# Altium PCB PCB_board.PcbDoc
Units mm, origin at the board's own origin, x right, y up, seen from the top; angles counter-clockwise.
Board outline 43 x 43 mm, 2 copper layers (Top Layer, Bottom Layer), stack 0.325 mm thick; 52 components, 33 nets, 177 pads, 43 vias.
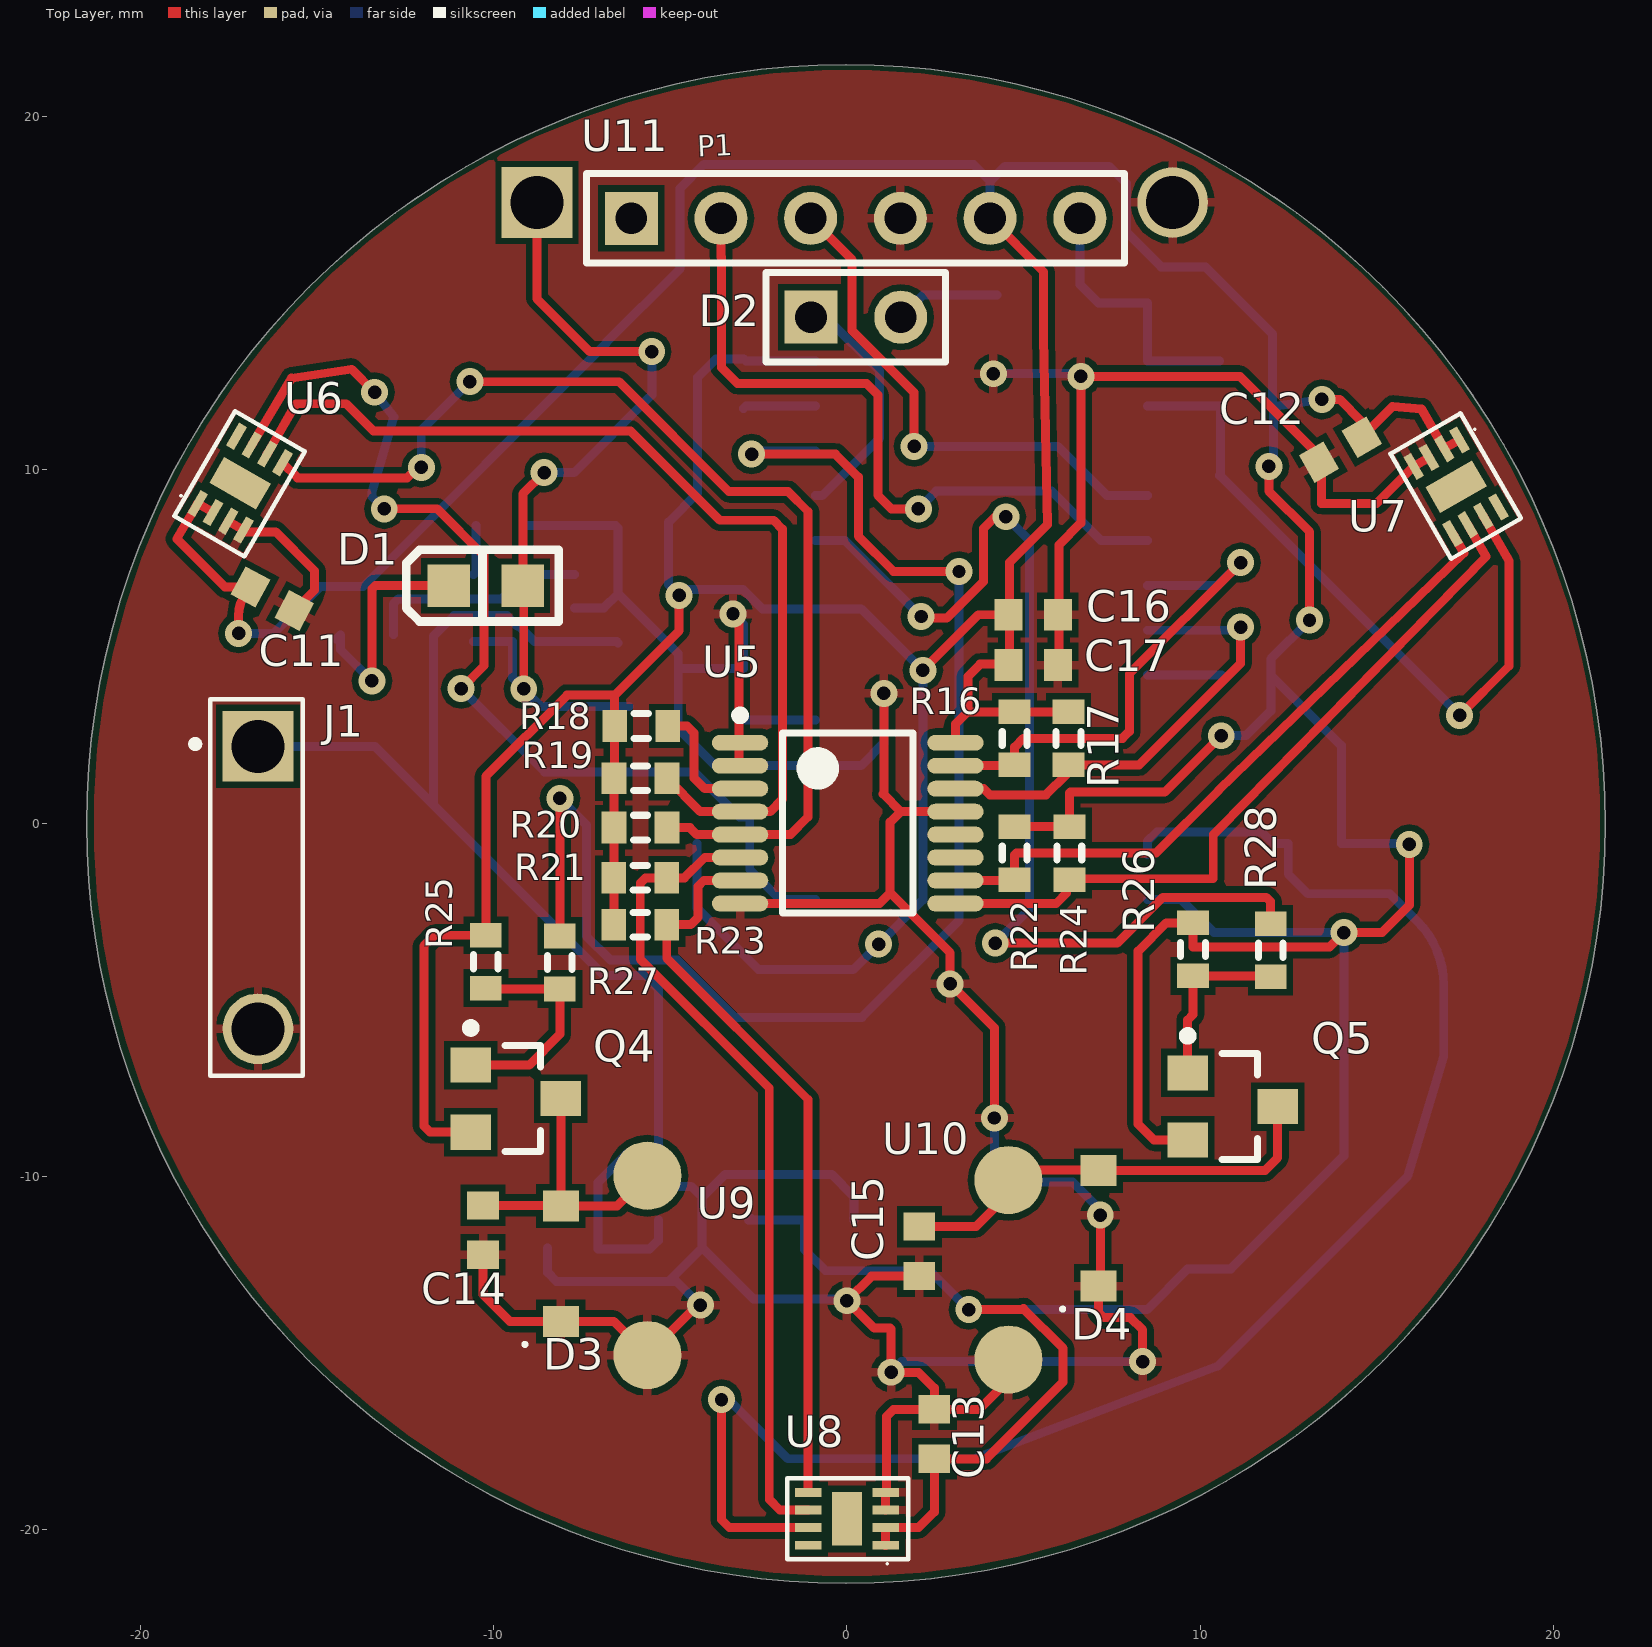
[diagram p0: Top Layer view]
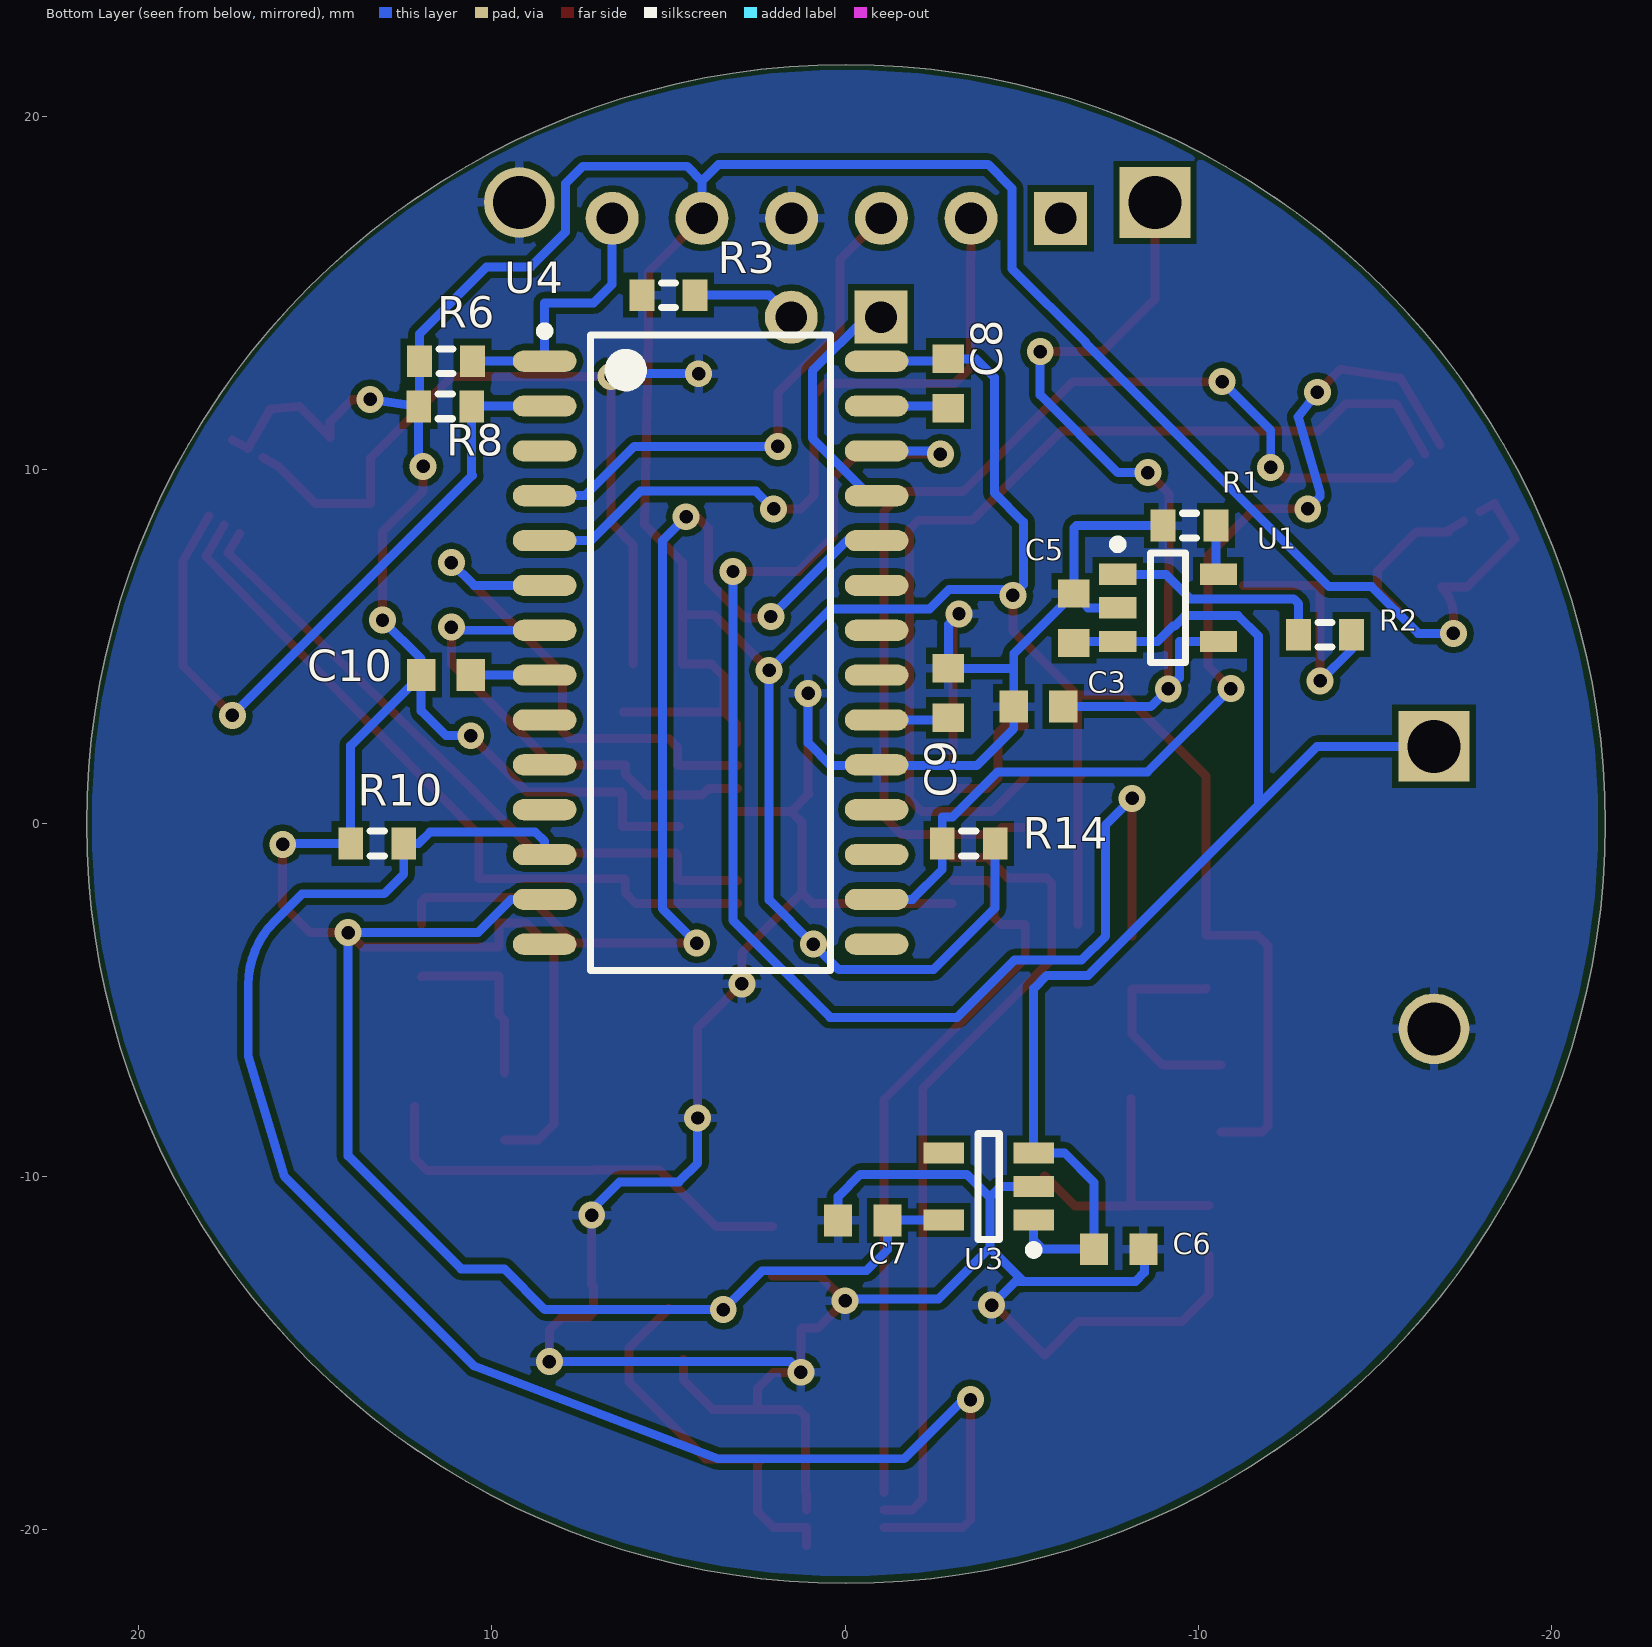
[diagram p1: Bottom Layer view, seen from below]

## Layer stack, top to bottom
Top Solder: solder mask 0.0102, Solder Resist, Dk 3.5
Top Layer: signal copper 0.0356
Dielectric 1: core 0.254, FR-4, Dk 4.2
Bottom Layer: signal copper 0.0356
Bottom Solder: solder mask 0.0102, Solder Resist, Dk 3.5

## Board outline
-21.525,-0.025 ccw(c-0.025,-0.025) -0.025,-21.525 ccw(c-0.025,-0.025) 21.475,-0.025 ccw(c-0.025,-0.025) -0.025,21.475 ccw(c-0.025,-0.025)

## Design rules (kind name [scope] priority, off if disabled: settings)
BoardOutlineClearance [All] p1: gap=0.178 ignorepadtopadclearanceinfootprint=FALSE
Clearance [All] p1: gap=0.18 ignorepadtopadclearanceinfootprint=TRUE
ComponentClearance [All] p1: gap=0 collisioncheckmode=3 verticalgap=0 showdistances=FALSE
ComponentOrientations [All] p1: allowedrotations=32
MinimumSolderMaskSliver MinimumSolderMaskSliver_1 [InComponent('U6') or InComponent('U7') or InComponent('U8') or InComponent('U3') or InComponent('U2') or InComponent('U1')] p1: minsoldermaskwidth=0
MinimumSolderMaskSliver [All] p2: minsoldermaskwidth=0.178
NetAntennae [All] p1 off: netantennaetolerance=0
PolygonConnect [All] p1: connectstyle=Relief reliefconductorwidth=0.254 reliefentries=4 polygonreliefangle="90 Angle" airgapwidth=0.18
RoutingVias [All] p1: holewidth=0.381 width=0.762 viastyle="Through Hole" minholewidth=0.381 minwidth=0.762 maxholewidth=0.711 maxwidth=1.27
SilkToSilkClearance [All] p1: silktosilkclearance=0.152
SilkToSolderMaskClearance [HasFootprint('J1-0603')] p1: minsilkscreentomaskgap=0.1 clearancetoexposedcopper=TRUE
SilkToSolderMaskClearance SilkToSolderMaskClearance_1 [IsPad] p2: minsilkscreentomaskgap=0.152 clearancetoexposedcopper=TRUE
SolderMaskExpansion [All] p1: expansion=0.102
UnpouredPolygon [All] p1: allowunpoured=TRUE
Width [All] p1: maxlimit=0.254 minlimit=0.25 preferedwidth=0.254
24 further rules are at their usual default settings.

## Components (designator, comment, footprint, x,y, rotation, side; value= is the part's Value field where it differs from the comment)
C3 "Cap Semi" 1608[0603] -5.475,3.3 r180 bottom value=4.7uF
C5 "Cap Semi" 1608[0603] -6.475,5.8 r270 bottom value=4.7uF
C6 "16V" 1608[0603] -7.747,-12.065 r0 bottom value=0.1uF
C7 "16V" 1608[0603] -0.5,-11.25 r180 bottom value=1.0uF
C8 "Cap Semi" 1608[0603] -2.921,12.446 r90 bottom value=20uF
C9 "Cap Semi" 1608[0603] -2.921,3.683 r270 bottom value="10uF 6.3V"
C10 "Cap Semi" 1608[0603] 11.303,4.191 r180 bottom value="10uF 6.3V"
C11 "Cap Semi" 1608[0603] -16.268,6.354 r332 top value="0.1uF 16V"
C12 "Cap Semi" 1608[0603] 13.975,10.575 r30 top value="0.1uF 16V"
C13 "Cap Semi" 1608[0603] 2.475,-17.3 r270 top value="0.1uF 16V"
C14 "Cap Semi" 1608[0603] -10.3,-11.525 r90 top value="47pF 50V"
C15 "Cap Semi" 1608[0603] 2.05,-12.125 r90 top value="47pF 50V"
C16 "Cap Semi" 1608[0603] 5.275,5.9 r180 top value="10uF 6.3V"
C17 "Cap Semi" 1608[0603] 5.275,4.475 r180 top value="0.1uF 16V"
D1 "LTST-C171KRKT" LED_pcb -9.175,6.725 r180 top
D2 "TLVP4201" HDR1X2 -1.015,14.325 r0 top
D3 "MBR0520L-D" SODFL375X128-2N -8.1,-12.475 r90 top
D4 "MBR0520L-D" SODFL375X128-2N 7.125,-11.475 r90 top
J1 "Battery connector" JST_S2B-PH-K-S(LF)(SN) -16.675,-1.825 r90 top
P1 "Header 6" HDR1X6 -6.105,17.125 r0 top
Q4 "NTR4101PT1G" SOT95P290X111-3N -9.375,-7.8 r0 top
Q5 "NTR4101PT1G" SOT95P290X111-3N 10.925,-8.025 r0 top
R1 "Res3" J1-0603 -9.75,8.425 r0 bottom value=2k
R2 "Res3" J1-0603 -13.589,5.334 r0 bottom value=470
R3 "Res3" J1-0603 5,14.95 r0 bottom value=100
R6 "Res3" J1-0603 11.303,13.081 r0 bottom value=10K
R8 "Res3" J1-0603 11.325,11.8 r180 bottom value=10k
R10 "Res3" J1-0603 13.25,-0.575 r180 bottom value=10k
R14 "Res3" J1-0603 -3.5,-0.575 r180 bottom value=10k
R16 "1k" J1-0603 4.75,2.4 r90 top value=1K
R17 "1k" J1-0603 6.275,2.4 r90 top value=1K
R18 "1k" J1-0603 -5.825,2.75 r0 top value=1K
R19 "1k" J1-0603 -5.842,1.27 r0 top value=1K
R20 "1k" J1-0603 -5.842,-0.127 r0 top value=1K
R21 "Res3" J1-0603 -5.85,-1.55 r0 top value=1k
R22 "Res3" J1-0603 4.75,-0.85 r90 top value=1k
R23 "Res3" J1-0603 -5.85,-2.875 r0 top value=1k
R24 "Res3" J1-0603 6.3,-0.85 r90 top value=1k
R25 "Res3" J1-0603 -10.225,-3.925 r270 top value=47k
R26 "Res3" J1-0603 9.8,-3.575 r90 top value=47k
R27 "Res3" J1-0603 -8.128,-3.949 r270 top value=1k
R28 "Res3" J1-0603 12,-3.6 r270 top value=1k
U1 "MCP73831T-2ACI/OT" SOT95P270X145-5N -9.144,6.096 r180 bottom
U3 "TCR2EF33,LM(CT" SOT95P275X111-5N -4.064,-10.287 r0 bottom
U4 "PIC24FJ64GA002-I/SO" SOIC127P1030X265-28N 3.809,4.826 r180 bottom
U5 "PCA9546APWR" PCA9546APWR 0.025,0 r0 top
U6 "BH1745NUC" *UDFN-8 -18.383,9.05 r60 top
U7 "BH1745NUC" *UDFN-8 17.35,10.853 r300 top
U8 "BH1745NUC" *UDFN-8 1.1,-20.45 r180 top
U9 "C1030B028F" PCBComponent_1 -5.65,-12.525 r270 top
U10 "C1030B028F" PCBComponent_1 4.575,-12.65 r270 top
U11 "Charge_Pad" charge_pad -8.775,17.575 r0 top

## Footprints (in the part's own frame and the unit in brackets; to place one, negate y for a bottom-side part, rotate by r counter-clockwise, add the part's x,y. Pads: shape width x height; smd on the part's side, far side on the other; paste and mask are expansions set on the pad)
1608[0603] [mm] "Chip Capacitor, Body 1.6x0.8mm, IPC High Density"
  rect 0.8x0.9 smd: 1(-0.7,0) 2(0.7,0)
  body extent -0.87,-0.48 0.87,0.48, height 1.3
*UDFN-8 [mm]
  rect 0.75x0.25 smd: 1(0,0) 2(0,-0.5) 3(0,-1) 4(0,-1.5) 5(2.2,-1.5) 6(2.2,-1) 7(2.2,-0.5) 8(2.2,0)
  rect 0.85x1.524 smd: THERM(1.1,-0.75)
  silkscreen extent -0.63,-1.89 2.79,0.52
charge_pad [mm]
  rect 2x2 hole 1.5: 1(0,0)
  round 2 hole 1.5: 2(18,0)
HDR1X2 [mm] "Connector; Header; 2 Position"
  rect 1.5x1.5 hole 0.9: 1(0,0)
  round 1.5 hole 0.9: 2(2.54,0)
  silkscreen extent -1.27,-1.27 3.81,1.27
HDR1X6 [mm] "Connector; Header; 6 Position"
  rect 1.5x1.5 hole 0.9: 1(0,0)
  round 1.5 hole 0.9: 2(2.54,0) 3(5.08,0) 4(7.62,0) 5(10.16,0) 6(12.7,0)
  silkscreen extent -1.27,-1.27 13.97,1.27
J1-0603 [mm] "Chip Resistor, Body 1.6x0.8mm, IPC High Density"
  rect 0.7x0.9 smd: 1(-0.75,0) 2(0.75,0)
  silkscreen extent -0.2,-0.35 0.2,0.35, body extent -0.85,-0.48 0.85,0.48, height 0.9
JST_S2B-PH-K-S(LF)(SN) [mm]
  rect 2x2 hole 1.5: 1(4,0)
  round 2 hole 1.5: 2(-4,0)
  silkscreen extent -5.33,-1.27 5.33,1.88
LED_pcb [mm]
  rect 1.2x1.2 smd: 1(0,0) 2(2.1,0)
  silkscreen extent -1.02,-1.02 3.3,1.02
PCA9546APWR [mm] "TSOP, 16-Leads, Body 5.00x4.40mm, Pitch 0.65mm, IPC Medium Density"
  oval 1.6x0.45 smd: 1(-3.05,2.275) 2(-3.05,1.625) 3(-3.05,0.975) 4(-3.05,0.325) 5(-3.05,-0.325) 6(-3.05,-0.975) 7(-3.05,-1.625) 8(-3.05,-2.275) 9(3.05,-2.275) 10(3.05,-1.625) 11(3.05,-0.975) 12(3.05,-0.325) 13(3.05,0.325) 14(3.05,0.975) 15(3.05,1.625) 16(3.05,2.275)
  silkscreen extent -3.17,-2.55 1.85,3.17, body extent -2.25,-2.55 2.25,2.55, height 1.2
PCBComponent_1 [mil]
  round 76 smd: 1(-100,0) 2(100,0)
SODFL375X128-2N [mm] "SODFL, 2-Leads, Body 1.60x3.75mm, IPC Medium Density"
  rect 0.88x1.02 smd: 1(-1.635,0) 2(1.635,0)
  silkscreen extent -2.34,0.97 -2.24,1.07, body extent -1.43,-0.9 1.42,0.9, height 1.28
SOIC127P1030X265-28N [mm] "SOIC, 28-Leads, Body 17.90x7.50mm, Pitch 1.27mm, IPC Medium Density"
  oval 1.8x0.6 smd: 1(-4.7,8.255) 2(-4.7,6.985) 3(-4.7,5.715) 4(-4.7,4.445) 5(-4.7,3.175) 6(-4.7,1.905) 7(-4.7,0.635) 8(-4.7,-0.635) 9(-4.7,-1.905) 10(-4.7,-3.175) 11(-4.7,-4.445) 12(-4.7,-5.715) 13(-4.7,-6.985) 14(-4.7,-8.255) 15(4.7,-8.255) 16(4.7,-6.985) 17(4.7,-5.715) 18(4.7,-4.445) 19(4.7,-3.175) 20(4.7,-1.905) 21(4.7,-0.635) 22(4.7,0.635) 23(4.7,1.905) 24(4.7,3.175) 25(4.7,4.445) 26(4.7,5.715) 27(4.7,6.985) 28(4.7,8.255)
  silkscreen extent -4.83,-9 3.4,9.23, body extent -3.8,-9 3.8,9, height 2.65
SOT95P270X145-5N [mm] "SOT23, 5-Leads, Body 2.90x2.70mm, Pitch 0.95mm, IPC Medium Density"
  rect 1.05x0.6 smd: 1(-1.425,0.95) 2(-1.425,0) 3(-1.425,-0.95) 4(1.425,-0.95) 5(1.425,0.95)
  silkscreen extent -1.55,-1.55 0.5,1.92, body extent -0.9,-1.55 0.9,1.55, height 1.45
SOT95P275X111-5N [mm] "SOT23, 5-Leads, Body 2.92x2.75mm, Pitch 0.95mm, IPC Medium Density"
  rect 1.15x0.6 smd: 1(-1.275,0.95) 2(-1.275,0) 3(-1.275,-0.95) 4(1.275,-0.95) 5(1.275,0.95)
  silkscreen extent -1.4,-1.5 0.3,1.92, body extent -0.7,-1.52 0.7,1.52, height 1.11
SOT95P290X111-3N [mm] "SOT23, 3-Leads, Body 2.92x2.90mm, Pitch 0.95mm, IPC Medium Density"
  rect 1.15x1 smd: 1(1.275,0) 2(-1.275,0.95) 3(-1.275,-0.95)
  silkscreen extent -1.4,-1.5 0.7,2.12, body extent -0.7,-1.52 0.7,1.52, height 1.11

## Part data
C3 C5 C8 C9 C10 C11 C12 C13 C14 C15 C16 C17: "Capacitor (Semiconductor SIM Model)", LatestRevisionDate=29-May-2009, LatestRevisionNote="IPC-7351 Footprint Added.", PackageDescription="Chip Capacitor", PackageReference=C1206, Published=8-Jun-2000, Publisher="Altium Limited"
C6 C7: library part "Cap Semi", "Capacitor (Semiconductor SIM Model)", LatestRevisionDate=29-May-2009, LatestRevisionNote="IPC-7351 Footprint Added.", PackageDescription="Chip Capacitor", PackageReference=C1206, Published=8-Jun-2000, Publisher="Altium Limited"
D1: library part LED2, "Typical RED, GREEN, YELLOW, AMBER GaAs LED", LatestRevisionDate=17-Jul-2002, LatestRevisionNote="Re-released for DXP Platform.", PackageDescription="SM LED; 2 Flat Leads", PackageReference=3.2X1.6X1.1, PackageVersion=Feb-2002, Published=8-Jun-2000, Publisher="Altium Limited"
D2: library part LED0, "Typical INFRARED GaAs LED", LatestRevisionDate=08-Jul-2005, LatestRevisionNote="Mech Layer 1 removed.", PackageDescription="LED; 2 Leads", PackageReference=LED-0, Published=8-Jun-2000, Publisher="Altium Limited"
D3 D4: library part "D Schottky", "Schottky Diode", Code_JEDEC=DO-214-AA, LatestRevisionDate=17-Jul-2002, LatestRevisionNote="Re-released for DXP Platform.", PackageDescription="DO-214-AA/SMB; 2 C-Bend Leads; Body 5.3 x 3.6 mm, inc. leads (LxW)", PackageReference=SMB, Published=8-Jun-2000, Publisher="Altium Limited"
J1: library part S2B-PH-K-S(LF)(SN), "PH Series 2 Position 2.0 mm Through Hole Side Entry Shrouded Header", Package=None, Digi-Key_Part_Number=455-1719-ND, Digi-Key_Purchase_URL=https://www.digikey.com/product-detail/en/jst-sales-america-inc/S2B-PH-K-S_LF__SN_/455-1719-ND/926626?utm_source=snapeda&utm_medium=aggregator&utm_campaign=symbol, MF="JST Sales", MP=S2B-PH-K-S_LF__SN_, SnapEDA_Link=https://www.snapeda.com/parts/S2B-PH-K-S%28LF%29%28SN%29/JST%20Sales%20America%20Inc./view-part/?ref=snap
P1: "Header, 6-Pin", LatestRevisionDate=17-Jul-2002, LatestRevisionNote="Re-released for DXP Platform.", Publisher="Altium Limited"
Q4 Q5: library part MOSFET-P, "P-Channel MOSFET", LatestRevisionDate=17-Jul-2002, LatestRevisionNote="Re-released for DXP Platform.", PackageDescription="TO, Flat Index; 3 In-Line, Axial Leads; Body Dia. 4.6mm; Lead Dia. 0.5 mm (max)", PackageReference=E3, PackageVersion=1995/1996, Published=8-Jun-2000, Publisher="Altium Limited"
R1 R2 R3 R6 R8 R10 R14 R21 R22 R23 R24 R25 R26 R27 R28: "Resistor", LatestRevisionDate=29-May-2009, LatestRevisionNote="IPC-7351 Footprint Added.", PackageDescription="Chip Resistor", PackageReference=J1-0603, Published=8-Jun-2000, Publisher="Altium Limited"
R16 R17 R18 R19 R20: library part Res3, "Resistor", LatestRevisionDate=29-May-2009, LatestRevisionNote="IPC-7351 Footprint Added.", PackageDescription="Chip Resistor", PackageReference=J1-0603, Published=8-Jun-2000, Publisher="Altium Limited"
U1 U3 U4 U5 U6 U7 U8 U9 U10 U11: library part Component_1

## Via types
v1: diameter 0.762, hole 0.381, Top Layer to Bottom Layer, 43 vias

## Nets (pads, with @x,y where several pads share a name; then routed paths per layer and width w, separated by ;. In a path a pad name is that pad's centre, name@x,y a point inside that pad or via, vN(x,y) a via of type N, cw(c..) or ccw(c..) an arc to the next point about the centre after c; other vN are vias at no path point)
GND: C3.1 C5.1 C6.1 C7.1 C9.1 C11.2 C12.1 C13.1 C14.1 C15.1 C16.1 C17.1 D3.1 D4.1 J1.2 P1.4 R1.2 R3.2 U1.2 U3.2 U4.19 U5.1 U5.2 U5.8 U5.13 U6.3 U6.4 U7.3 U7.4 U8.3 U8.4 U9.2 U10.2 U11.2 | length 133.6
  Top Layer w0.254: U6.3 U6.4 -17.084,8.247 -16.178,8.247 -15.075,7.144 -15.075,6.6 C11.2 ; C14.1 -10.3,-13.35 -9.54,-14.11 D3.1 -6.605,-14.11 U9.2 -4.235,-13.65 v1(-4.15,-13.65) ; v1(-3.225,5.925) -3.05,5.75 U5.2@-3.05,1.625 ; U5.8 0.925,-2.275 1.225,-1.975 ; v1(1.05,3.675) 1.05,0.85 1.025,0.825 1.525,0.325 ; U8.3 U8.4 1.125,-18.925 1.125,-16.8 1.325,-16.6 C13.1 ; C15.1 0.7,-12.825 v1(0,-13.525) 0.775,-14.3 1.225,-14.3 1.25,-14.325 v1(1.25,-15.55) 2.025,-15.55 2.475,-16 C13.1 ; U5.13@3.05,0.325 1.525,0.325 ; v1@4.045,12.725 v1(4.15,12.725) ; v1(4.175,-8.35) 4.175,-5.8 v1(2.925,-4.55) 2.925,-3.675 1.225,-1.975 ; U10.2 4.575,-15.775 3.75,-16.6 C13.1 ; C17.1@6,4.5 6,7.875 6.625,8.5 v1(6.625,12.65) 11.125,12.65 13.444,10.331 13.444,9.056 15.004,9.056 U7.4 U7.3 ; v1(7.175,-11.1) 7.175,-13.06 D4.1 7.125,-13.85 7.275,-14 8.025,-14 8.375,-14.35 v1(8.375,-15.25) ; 1.225,-1.975 1.225,0.025 1.525,0.325
  Bottom Layer w0.254: R1.2 -6.55,8.425 -6.475,8.35 C5.1 ; C6.1@-8.477,-12.035 -8.477,-12.723 -8.225,-12.975 -5.05,-12.975 ; U1.2 -6.879,6.096 C5.1 ; U3.2 -4.413,-10.287 -4.1,-10.6 ; v1(-4.15,-13.65) -4.825,-12.975 -5.05,-12.975 ; v1(-3.225,5.925) -2.921,5.621 C9.1 -4.767,4.383 -4.775,4.375 ; v1(0,-13.525) -0.05,-13.475 -2.65,-13.475 -4.1,-12.025 ; C7.1@0.192,-11.176 C7.1@0.2,-11.168 ; C7.1 0.2,-10.575 -0.431,-9.944 -3.444,-9.944 -4.1,-10.6 ; v1(1.05,3.675) 1.05,2.275 0.4,1.625 -3.725,1.625 -4.775,2.675 C3.1 -4.775,4.375 ; v1(1.25,-15.55) 1.55,-15.25 v1(8.375,-15.25) ; v1(4.15,12.725) 6.55,12.725 v1(6.625,12.65) ; v1(4.175,-8.35) 4.175,-9.625 4.71,-10.16 6.385,-10.16 7.175,-10.95 v1(7.175,-11.1) ; C5.1 -4.775,4.8 -4.775,4.375 ; -5.05,-12.975 -4.1,-12.025 ; -4.1,-12.025 -4.1,-10.6
I2C_SCL: R17.1 U4.7 U5.14 | length 13.6
  Top Layer w0.254: U5.14@3.05,0.975 U5.14 3.875,0.975 4.05,0.8 5.636,0.8 6.225,1.389 6.225,1.65 R17.1 8.275,1.65 11.15,4.525 v1(11.15,5.55)
  Bottom Layer w0.254: U4.7 11.061,5.461 v1(11.15,5.55)
I2C_SDA: R16.1 U4.6 U5.15 | length 14.6
  Top Layer w0.254: U5.15@3.05,1.625 U5.15 4.65,1.625 R16.1@4.675,1.65 ; R16.1 4.75,2.15 5,2.4 7.8,2.4 8,2.6 8,4.225 v1(11.15,7.375)
  Bottom Layer w0.254: U4.6 10.506,6.731 v1(11.15,7.375)
INT0: R14.1 U4.16 U6.7 | length 29.3
  Top Layer w0.25: U6.7 -15.725,12.6 -14.025,12.85 v1(-13.375,12.2) ; v1(-13.1,8.9) -11.6,8.9 -10.275,7.575 -10.275,4.457 v1(-10.922,3.81)
  Bottom Layer w0.25: v1(-13.375,12.2) -12.825,11.5 -13.45,9.35 -13.45,9.25 v1(-13.1,8.9) ; v1(-10.922,3.81) -8.562,1.45 -4.325,1.45 -3.05,0.175 -2.75,0.175 R14.1 -2.75,-1.314 -1.905,-2.159 U4.16
INT1: R8.2 U4.2 U7.7 | length 20.1
  Top Layer w0.25: v1(17.35,3.05) 18.75,4.45 18.75,7.425 U7.7
  Bottom Layer w0.25: U4.2 10.564,11.811 R8.2 10.575,9.869 10.553,9.847 v1(17.35,3.05)
INT2: R10.2 U4.12 U8.7 | length 46
  Top Layer w0.25: v1(-3.55,-16.325) -3.55,-19.725 -3.325,-19.95 U8.7
  Bottom Layer w0.25: v1(-3.55,-16.325) -3.35,-16.325 -1.675,-18 3.6,-18 10.5,-15.375 15.881,-9.994 16.9,-6.6 16.9,-4.577 ccw(c14.36,-4.577) 16.156,-2.781 15.375,-2 13.05,-2 12.5,-1.45 R10.2 12.075,-0.575 11.75,-0.25 8.775,-0.25 8.509,-0.516 U4.12
"Motor 1": C14.2 D3.2 Q4.1 U9.1 | length 8
  Top Layer w0.254: C14.2 D3.2@-8.115,-10.825 ; Q4.1 -8.1,-10.81 D3.2@-8.115,-10.825 ; U9.1 -6.505,-10.84 D3.2 D3.2@-8.115,-10.825
"Motor 2": C15.2 D4.2 Q5.1 U10.1 | length 12.4
  Top Layer w0.254: C15.2 3.65,-11.425 5.25,-9.825 7.08,-9.825 D4.2@7.1,-9.805 ; D4.2 11.835,-9.84 12.2,-9.475 Q5.1
NetC8_1: C8.1 U4.27 | length 2.1
  Bottom Layer w0.254: C8.1 -2.856,11.811 U4.27
NetC9_2: C9.2 U4.20 | length 2.1
  Bottom Layer w0.254: C9.2 -2.859,2.921 U4.20
NetC10_2: C10.2 U4.8 | length 2.1
  Bottom Layer w0.254: U4.8 C10.2
NetD1_2: D1.2 R2.1 | length 6.7
  Top Layer w0.254: v1(-13.45,4.025) -13.45,6.625 -13.35,6.725 D1.2
  Bottom Layer w0.254: R2.1@-14.466,5.207 R2.1 -14.339,4.914 v1(-13.45,4.025)
NetD2_1: D2.1 U4.25 | length 7
  Bottom Layer w0.254: D2.1 -0.595,14.325 0.925,12.805 0.925,10.899 -0.703,9.271 U4.25
NetD2_2: D2.2 R3.1 | length 3
  Bottom Layer w0.254: D2.2 2.15,14.95 R3.1
NetQ4_2: Q4.2 R25.2 R27.2 | length 6.3
  Top Layer w0.254: Q4.2 -9,-6.85 -8.128,-5.978 R27.2 -10.201,-4.699 R25.2
NetQ5_2: Q5.2 R26.1 R28.2 | length 5
  Top Layer w0.254: Q5.2 9.65,-5.575 9.8,-5.425 R26.1 11.975,-4.325 R28.2
NetR1_1: R1.1 U1.5 | length 1.4
  Bottom Layer w0.254: U1.5 -10.5,7.115 R1.1
NetR2_2: R2.2 U1.1 | length 6.3
  Bottom Layer w0.254: R2.2 -12.839,6.211 -12.7,6.35 -9.779,6.35 -9.083,7.046 U1.1
NetR18_2: R18.2 U5.3 | length 3.5
  Top Layer w0.254: R18.2 -4.525,2.75 -4.325,2.55 -4.325,1.275 -4.025,0.975 U5.3@-3.05,0.975
nMCLR: P1.6 R6.1 U4.1 | length 7.7
  Bottom Layer w0.254: P1.6 6.595,15.255 7.118,14.732 8.509,14.732 U4.1 R6.1
PGC1: P1.2 U4.5 | length 20.4
  Top Layer w0.254: P1.2 -3.565,16.035 -3.555,16.025 -3.555,12.905 -3.1,12.45 0.55,12.45 0.875,12.125 0.875,9.285 1.26,8.9 v1(2.025,8.9)
  Bottom Layer w0.254: v1(2.025,8.9) 2.525,9.4 5.8,9.4 7.199,8.001 U4.5
PGD1: P1.3 U4.4 | length 14.9
  Top Layer w0.254: P1.3 0.15,15.95 0.15,13.947 1.905,12.192 v1(1.905,10.668)
  Bottom Layer w0.254: v1(1.905,10.668) 5.969,10.668 7.366,9.271 U4.4
"PWM 1": R27.1 U4.26 | length 40.7
  Top Layer w0.254: R27.1 -8.128,0.697 v1(-8.125,0.7) ; v1(-2.7,10.45) -0.325,10.45 0.325,9.8 0.325,8.125 1.325,7.125 v1(3.175,7.125)
  Bottom Layer w0.254: v1(-8.125,0.7) -7.376,-0.049 -7.376,-3.199 -6.7,-3.875 -4.8,-3.875 -3.175,-5.5 0.425,-5.5 3.175,-2.75 v1(3.175,7.125) ; v1(-2.7,10.45) -2.609,10.541 U4.26
"PWM 2": R28.1 U4.24 | length 30.1
  Top Layer w0.254: v1(2.1,5.85) 2.148,5.802 2.825,5.802 3.863,6.84 3.863,8.338 4.2,8.675 v1(4.5,8.675) ; v1(4.2,-3.4) 7.65,-3.4 8.95,-2.1 11.875,-2.1 12,-2.225 R28.1
  Bottom Layer w0.254: U4.24 -0.051,8.001 v1(2.1,5.85) ; v1(4.2,-3.4) 5.175,-2.425 5.175,8 v1(4.5,8.675)
rgb_pwr_1: C7.2 C8.2 C10.1 C11.1 C12.2 C13.2 C16.2 C17.2 P1.5 Q4.3 Q5.3 R6.2 R8.1 R10.1 R14.2 R16.2 R17.2 R18.1 R19.1 R20.1 R21.1 R22.2 R23.1 R24.2 R25.1 R26.2 U3.5 U4.13 U4.28 U5.16 U6.1 U6.2 U7.1 U7.2 U8.1 U8.2 | length 228.6
  Top Layer w0.254: U6.2@-17.98,8.83 U6.1 -18.975,8.05 -17.607,6.682 C11.1 ccw(c-16.068,5.864) -17.225,5.864 v1(-17.225,5.375) ; Q4.3 -11.8,-8.75 -11.975,-8.575 -11.975,-3.475 -11.675,-3.175 R25.1 -10.225,1.325 -7.925,3.625 -6.575,3.625 ; R19.1@-6.71,1.388 R19.1 ; R23.1 R21.1 -6.592,-1.542 R20.1 R19.1 ; v1(-4.75,6.45) -4.75,5.45 -6.575,3.625 ; U8.1 U8.2 2.025,-19.95 2.475,-19.5 C13.2 3.95,-18 6.125,-15.825 6.125,-14.875 5,-13.75 4.975,-13.775 v1(3.45,-13.775) ; v1(2.15,4.325) 3.725,5.9 C16.2 C16.2@4.6,5.9 ; C13.2@2.37,-18.03 C13.2@2.4,-18 ; U5.16 3.075,2.8 3.425,3.15 ; P1.5 5.567,15.613 5.567,13.742 5.676,8.451 4.6,7.375 C16.2@4.6,5.9 ; R16.2@4.6,3.15 3.425,3.15 ; R22.2@4.7,-0.1 R22.2 6.2,-0.1 R24.2@6.225,-0.075 ; R16.2 R17.2 ; R24.2 6.3,0.85 6.325,0.875 9,0.875 v1(10.6,2.475) ; Q5.3 8.7,-8.975 8.25,-8.525 8.25,-3.625 9.05,-2.825 R26.2 9.8,-3.507 13.668,-3.507 v1(14.075,-3.1) 15.15,-3.1 15.925,-2.325 v1(15.925,-0.6) ; v1(11.95,10.1) 11.95,9.4 13.1,8.25 v1(13.1,5.75) ; v1(13.45,12) 13.95,12 14.581,11.369 C12.2 15.456,11.8 16.275,11.725 16.911,10.612 U7.2 ; U7.2@16.946,10.632 U7.1 ; R19.1 -6.575,1.287 R18.1 -6.575,3.625 ; 3.425,3.15 3.425,4.15 3.775,4.5 4.6,4.5 C16.2@4.6,5.9
  Bottom Layer w0.254: v1(-17.225,5.375) -16.225,5.375 -14.9,6.7 -13.7,6.7 -6.825,13.575 -6.825,13.6 -4.725,15.7 -4.725,17.975 -4.05,18.65 3.585,18.65 4.055,18.18 ; R14.2 -4.25,-2.4 -2.5,-4.15 0.175,-4.15 v1(0.9,-3.425) 2.15,-2.175 v1(2.15,4.325) 0.407,6.068 -2.393,6.068 -2.938,6.613 -4.587,6.613 v1(-4.75,6.45) -5.05,6.75 -5.05,8.525 -4.225,9.35 -4.225,12.625 -3.704,13.146 C8.2 -2.856,13.081 U4.28 ; U3.5@-2.728,-11.176 U3.5 -1.213,-11.237 C7.2 -1.2,-12.075 -0.6,-12.675 2.35,-12.675 v1(3.45,-13.775) 8.5,-13.775 9.65,-12.625 10.875,-12.625 14.075,-9.425 v1(14.075,-3.1) 10.4,-3.1 9.459,-2.159 U4.13 ; P1.5 4.055,18.18 ; v1(10.6,2.475) 11.3,2.475 12.003,3.178 C10.1 ; v1(11.95,10.1) 12.075,10.225 R8.1 ; v1(13.1,5.75) 12.003,4.653 C10.1 ; v1(13.45,12) R8.1 ; v1(15.925,-0.6) 15.9,-0.575 R10.1 14,2.194 C10.1 ; 4.055,18.18 4.475,18.6 7.425,18.6 7.918,18.107 7.918,16.732 8.9,15.75 10.15,15.75 12.053,13.847 R6.2 12.053,11.822 R8.1
SC0: R20.2 U5.5 U6.5 | length 31.3
  Top Layer w0.25: U6.5 -15.554,9.775 -12.45,9.775 -12.1,10.125 v1(-12.05,10.075) ; v1(-10.675,12.5) -6.45,12.5 -3.337,9.387 -1.662,9.387 -1.1,8.825 -1.1,0.175 -1.6,-0.325 U5.5 -4.247,-0.325 -4.445,-0.127 R20.2
  Bottom Layer w0.25: v1(-12.05,10.075) -12.05,11.125 v1(-10.675,12.5)
SC1: R23.2 U5.7 U8.5 | length 20.8
  Top Layer w0.25: U5.7@-3.05,-1.625 -4.05,-1.625 -4.213,-1.787 -4.213,-2.663 -4.425,-2.875 R23.2 -5.1,-3.825 -1.1,-7.825 U8.5
SC2: R22.1 U5.10 U7.5 | length 19.2
  Top Layer w0.25: U5.10@3.05,-1.625 U5.10 4.675,-1.625 R22.1@4.7,-1.6 ; R22.1 4.75,-0.9 4.8,-0.85 8.75,-0.85 10.525,0.925 17.475,7.65 U7.5
SD0: R19.2 U5.4 U6.6 | length 28.3
  Top Layer w0.25: U6.6 -15.6,11.875 -14.175,11.875 -13.4,11.1 -6.125,11.1 -3.6,8.575 -2.075,8.575 -1.825,8.325 -1.825,0.675 -2.175,0.325 U5.4 -4.147,0.325 R19.2
SD1: R21.2 U5.6 U8.6 | length 23.3
  Top Layer w0.25: U5.6 -4.025,-0.975 -4.6,-1.55 R21.2 -5.7,-1.55 -5.85,-1.7 -5.85,-3.85 -2.2,-7.5 -2.2,-19.15 -1.9,-19.45 U8.6
SD2: R24.1 U5.9 U7.6 | length 21.2
  Top Layer w0.25: U5.9@3.05,-2.275 U5.9 5.925,-2.275 6.225,-1.975 6.225,-1.575 10.375,-1.575 10.375,-0.325 10.525,-0.175 18.1,7.55 U7.6
VBAT: C5.2 C6.2 J1.1 U1.3 U3.1 U3.3 | length 35.7
  Bottom Layer w0.254: J1.1 -13.364,2.175 -11.707,0.518 ; C5.2 -6.521,5.146 U1.3 -8.85,5.146 -9.284,5.58 -9.33,5.58 -9.625,5.875 -11.125,5.875 -11.707,5.293 -11.707,0.518 ; U3.1 -5.339,-11.814 -5.59,-12.065 C6.2 -7.047,-10.172 -6.212,-9.337 U3.3 -5.339,-4.686 -5.716,-4.309 -6.88,-4.309 -11.707,0.518
VPWR: C3.2 D1.1 U1.4 U11.1 | length 24.1
  Top Layer w0.254: v1@-9.025,3.925 v1(-9.15,3.8) -9.15,6.7 D1.1 -9.175,9.325 v1(-8.575,9.925) ; U11.1 -8.775,14.85 -7.275,13.35 v1(-5.525,13.35)
  Bottom Layer w0.254: U1.4 -9.464,5.146 -9.464,4.114 v1(-9.15,3.8) -8.65,3.3 C3.2 ; v1(-8.575,9.925) -7.725,9.925 -5.525,12.125 v1(-5.525,13.35)
pads on no net: P1.1 U3.4 U4.3 U4.9 U4.10 U4.11 U4.14 U4.15 U4.17 U4.18 U4.21 U4.22 U4.23 U5.11 U5.12 U6.8 U6.THERM U7.8 U7.THERM U8.8 U8.THERM

## Polygon pours and split planes (outlines as drawn)
GND on Bottom Layer "Bottom Layer-GND Plane" (solid, remove dead copper, pour order 10): -21.482,0 ccw(c0,0) 0,-21.482 ccw(c0,0) 21.482,0 ccw(c0,0) 0,21.482 ccw(c0,0)
GND on Top Layer "Top Layer-GND Plane" (solid, remove dead copper, pour order 12): -21.5,-0.125 ccw(c0,-0.125) 0,-21.625 ccw(c0,-0.125) 21.5,-0.125 ccw(c0,-0.125) 0,21.375 ccw(c0,-0.125)

## Silkscreen, mask and mechanical layers (free items; w line width, h text height)
Mechanical 1:
  circle w0.254: c0,0 r21.5